# EAGLE board untitled (EAGLE 7.5.0)
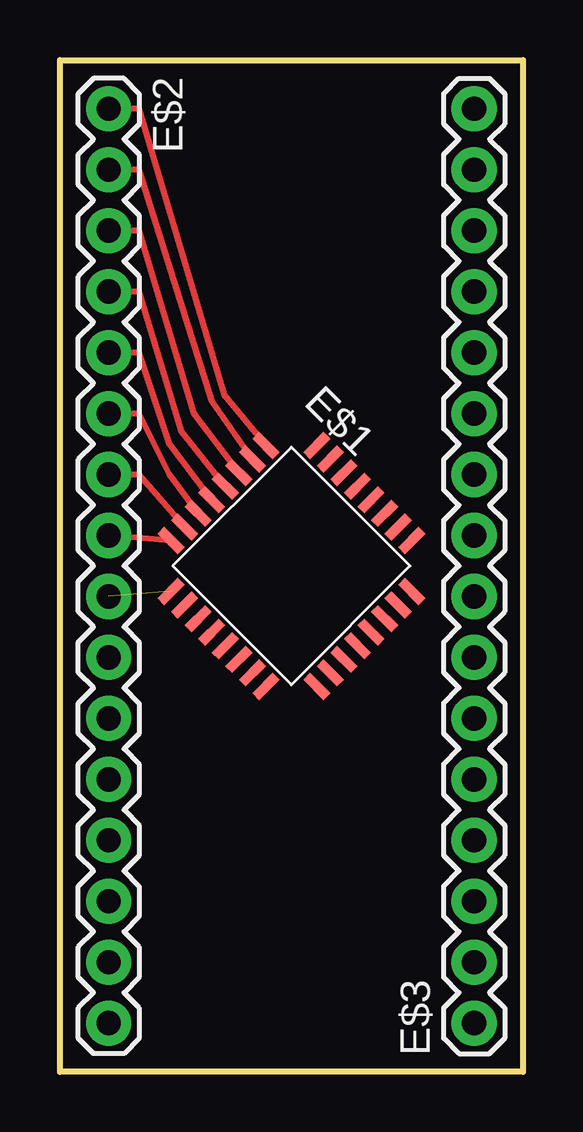
[diagram p0: board, top side]

Size 19.3 x 42.16 mm. Coordinates in mm from the lower left corner, seen from the top.
Outline: 0,42.16 19.3,42.16 19.3,0 0,0 0,42.16
Copper layers (1*16): Top 0.035mm / dielectric 1.5mm / Bottom 0.035mm
Design rules "default": minimum track width 10mil, minimum drill 24mil, track to track 8mil, track to pad 8mil, pad to pad 8mil, via to via 8mil, smd to smd 8mil, copper to edge 40mil, drill to drill 8mil, minimum pad ring 10mil, minimum via ring 8mil, stop-mask expansion 4mil, vias tented up to drill 0mil, thermal gap 10mil

## Footprints (pad centres in the part's own frame; a part is rotated, then mirrored left to right if it is on the bottom)
LQFP32-7X7 = smd 1.2 x 0.4: 1 -4.3,2.8; 2 -4.3,2; 3 -4.3,1.2; 4 -4.3,0.4; 5 -4.3,-0.4; 6 -4.3,-1.2; 7 -4.3,-2; 8 -4.3,-2.8; 17 4.3,-2.8; 18 4.3,-2; 19 4.3,-1.2; 20 4.3,-0.4; 21 4.3,0.4; 22 4.3,1.2; 23 4.3,2; 24 4.3,2.8 | smd 0.4 x 1.2: 9 -2.8,-4.3; 10 -2,-4.3; 11 -1.2,-4.3; 12 -0.4,-4.3; 13 0.4,-4.3; 14 1.2,-4.3; 15 2,-4.3; 16 2.8,-4.3; 25 2.8,4.3; 26 2,4.3; 27 1.2,4.3; 28 0.4,4.3; 29 -0.4,4.3; 30 -1.2,4.3; 31 -2,4.3; 32 -2.8,4.3
1X16 = drill 1.016 pad 1.88: 1 0,0; 2 2.54,0; 3 5.08,0; 4 7.62,0; 5 10.16,0; 6 12.7,0; 7 15.24,0; 8 17.78,0; 9 20.32,0; 10 22.86,0; 11 25.4,0; 12 27.94,0; 13 30.48,0; 14 33.02,0; 15 35.56,0; 16 38.1,0

## Placement (x,y rotation side)
E$1  [LQFP32-7X7]  9.65,21.08 315 top
E$2  [1X16]  2.03,40.13 270 top
E$3  [1X16]  17.27,2.03 90 top

## Library data of the parts
E$1 = st-microelectronics
E$2 E$3 = SparkFun-Connectors

## Nets
S$1: E$1.8 E$2.8
S$2: E$1.7 E$2.7
S$3: E$1.6 E$2.6
S$4: E$1.5 E$2.5
S$5: E$1.9 E$2.9
S$6: E$1.4 E$2.4
S$7: E$1.3 E$2.3
S$8: E$1.2 E$2.2
S$9: E$1.1 E$2.1

## Tracks (layer width: path | path; a pad name or v marks a point on that pad's centre or on a via)
S$1
  Top 0.254: E$1.8 E$2.8
S$2
  Top 0.254: E$1.7 3.3,24.89 E$2.7
S$3
  Top 0.254: E$1.6 4.57,24.89 3.3,27.43 E$2.6
S$4
  Top 0.254: E$1.5 4.57,26.16 3.3,29.97 E$2.5
S$5  (1 unrouted)
S$6
  Top 0.254: E$1.4 5.08,26.67 3.3,32.51 E$2.4
S$7
  Top 0.254: E$1.3 5.59,27.43 3.3,35.05 E$2.3
S$8
  Top 0.254: E$1.2 6.35,27.94 3.3,37.59 E$2.2
S$9
  Top 0.254: E$1.1 6.86,28.19 3.3,40.13 E$2.1